# EAGLE board wifi-board-vita (EAGLE 8.2.2)
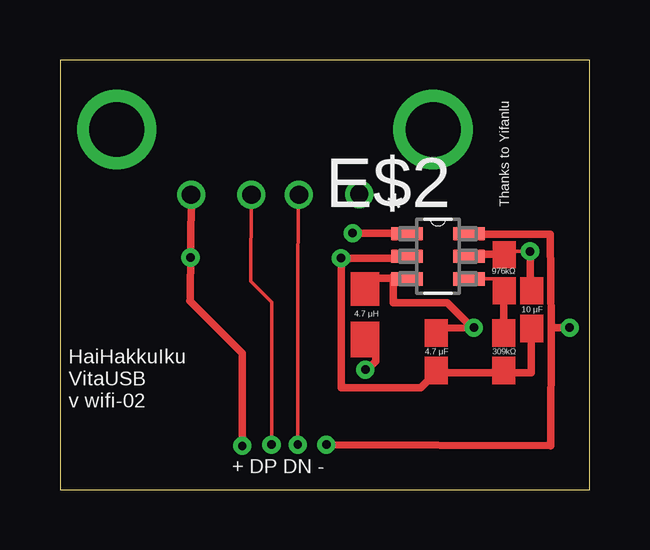
[diagram p0: board, top side]
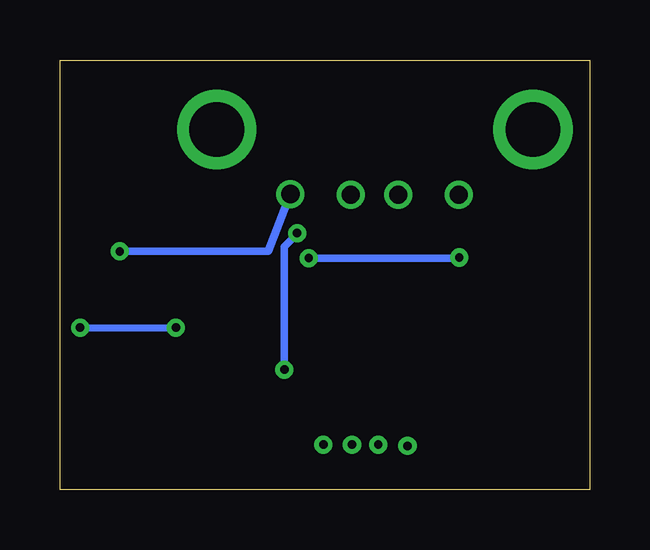
[diagram p1: board, bottom side, seen from below]

Size 22.07 x 17.91 mm. Coordinates in mm from the lower left corner, seen from the top.
Outline: 0,17.91 0,0 22.07,0 22.07,17.91 0,17.91
Copper layers (1*16): Top 0.035mm / dielectric 1.5mm / Bottom 0.035mm
Design rules "default": minimum track width 6mil, minimum drill 0.35mm, track to track 6mil, track to pad 6mil, pad to pad 6mil, via to via 6mil, smd to smd 6mil, copper to edge 40mil, drill to drill 6mil, minimum pad ring 10mil, minimum via ring 8mil, stop-mask expansion 4mil, vias tented up to drill 0mil, thermal gap 10mil

## Footprints (pad centres in the part's own frame; a part is rotated, then mirrored left to right if it is on the bottom)
SOT95P270X145-6N = smd 1.321 x 0.559: 1 -1.295,0.94; 2 -1.295,0; 3 -1.295,-0.94; 4 1.295,-0.94; 5 1.295,0; 6 1.295,0.94

## Placement (x,y rotation side)
E$2  [SOT95P270X145-6N]  15.75,9.73 0 top

## Library data of the parts
E$2 = Microchip_By_element14_Batch_1

## Tracks (layer width: path | path; a pad name or v marks a point on that pad's centre or on a via)
S$1  (via drill 0.76)
  Top 0.152: v5.46,12.29 5.46,12.37
  Top 0.305: 5.44,7.9 v5.46,12.29
S$2  (via drill 2.29)
  other vias: 2.36,15.01
S$3
  Top 0.305: 20.45,1.88 20.47,6.76 | 20.47,6.76 20.42,10.64 17.58,10.64 | 20.47,6.76 21.26,6.76
  Bottom 0.305: 21.26,6.76 17.27,6.73
S$4  (via drill 0.35)
  other vias: 5.44,9.68
S$5
  Top 0.152: 7.95,8.71 7.98,12.27
S$6
  Top 0.152: 9.93,12.32 9.91,8.2 9.91,1.83
S$7  (via drill 2.29)
  other vias: 15.54,15.01
S$8  (via drill 0.76)
  other vias: 7.98,12.29
S$9  (via drill 0.76)
  other vias: 9.96,12.29
S$10
  Top 0.152: 7.95,8.69 8.81,7.82 8.81,1.85
S$11
  Top 0.152: 17.63,8.79 18.11,8.79
S$12
  Top 0.305: 18.49,7.95 18.49,7.01
S$13
  Top 0.305: 17.63,9.8 18.03,9.8
S$14  (via drill 0.35, 0.76)
  Top 0.152: v19.58,9.93 18.57,9.93
  Top 0.305: v19.58,9.93 19.58,8.79
  Bottom 0.305: v19.58,9.93 13.39,9.93 v12.47,12.32
S$15
  Top 0.305: 11.71,9.65 13.97,9.65
S$16
  Top 0.305: 5.41,7.87 7.59,5.69 7.59,1.85
S$17  (via drill 0.35)
  Bottom 0.305: 5.44,9.65 v11.71,9.65
S$18  (via drill 0.35)
  other vias: 21.23,6.76
S$19  (via drill 0.35)
  Top 0.305: v17.25,6.76 15.8,6.73
S$20
  Top 0.305: 17.22,6.71 16.13,7.8 13.89,7.8 13.89,8.89
S$21
  Top 0.152: 19.02,4.88 18.42,4.88
  Top 0.305: 19.63,6.71 19.63,4.88 19.02,4.88 | 18.42,4.88 16.1,4.88
S$22  (via drill 0.35)
  Top 0.305: 13.89,10.69 v12.19,10.69
S$23
  Top 0.305: 13.26,8.81 13.82,8.81
S$24  (via drill 0.35)
  other vias: 12.73,5
S$25
  Bottom 0.305: 12.19,10.67 12.73,10.13 12.73,4.98
S$26
  Top 0.305: 12.73,4.93 13.16,5.36 13.16,5.87
S$27
  Top 0.305: 15.6,4.8 15.04,4.24 11.71,4.24 11.71,9.68
S$28  (via drill 0.35)
  other vias: 11.1,1.88
S$29  (via drill 0.35)
  other vias: 7.59,1.83
S$30  (via drill 0.35)
  other vias: 8.81,1.88
S$31  (via drill 0.35)
  other vias: 9.91,1.88
S$33
  Top 0.305: 11.13,1.88 20.45,1.83
(copper drawn outside any net)
  shapes: Top area x10

## Text on the board
_tsilk: Thanks to Yifanlu | 976kΩ | 4.7 μH | 10 μF | 4.7 μF | 309kΩ | HaiHakkuIku / VitaUSB / v wifi-02 | + DP DN -